# EAGLE board BATCH_V1_1 (EAGLE 6.4)
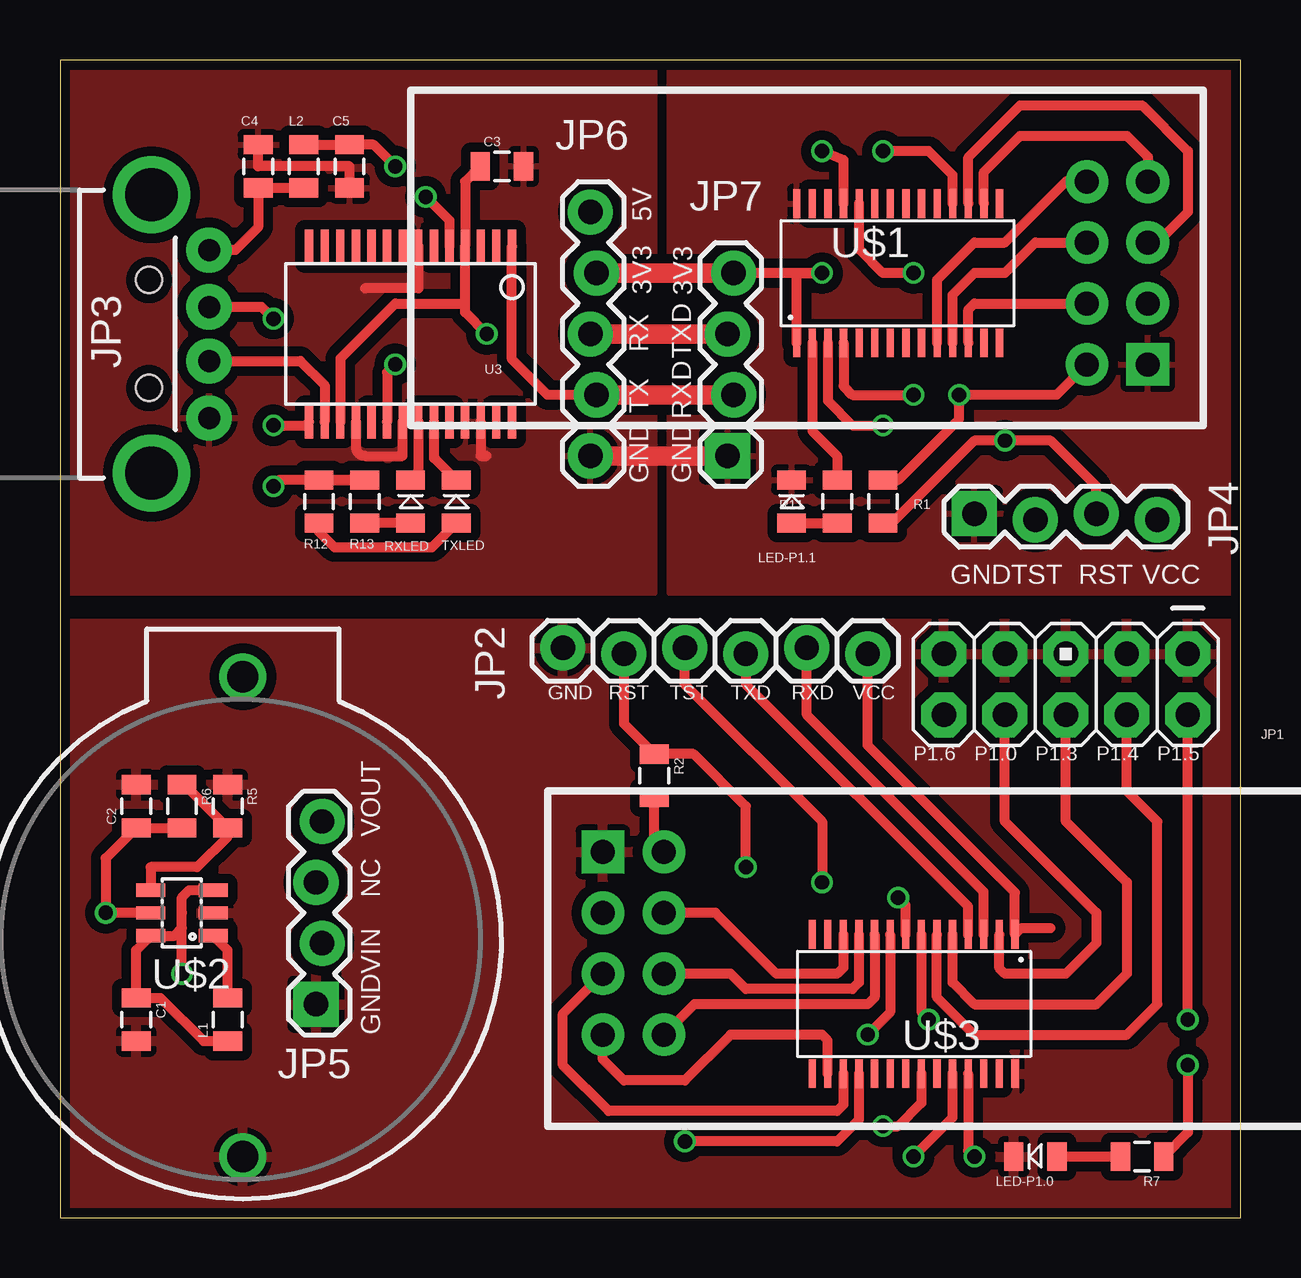
[diagram p0: board, top side]
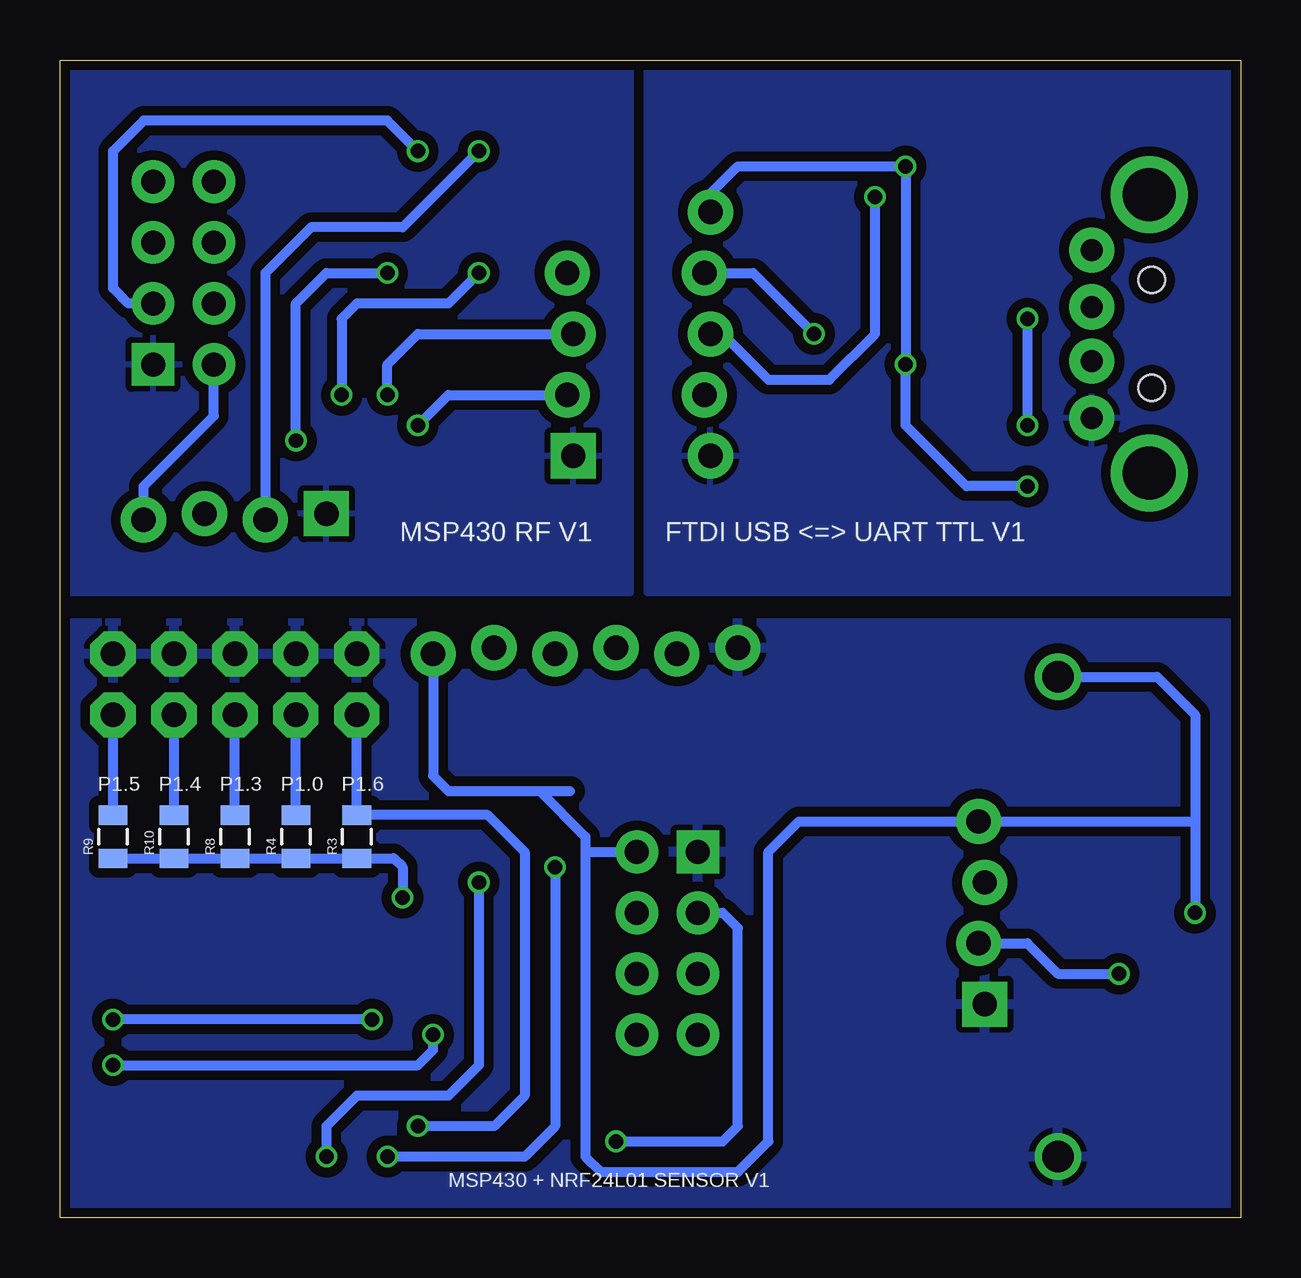
[diagram p1: board, bottom side, seen from below]

Size 49.2 x 48.25 mm. Coordinates in mm from the lower left corner, seen from the top.
Outline: 0,0 49.2,0 49.2,48.25 0,48.25 0,0
Copper layers (1*2*15*16): Top 0.035mm / dielectric 0.2mm / layer 2 0.0175mm / dielectric 1.1mm / layer 15 0.0175mm / dielectric 0.2mm / Bottom 0.035mm
Design rules "SeeedStudio_DRU_no_angle_20130527": minimum track width 6mil, minimum drill 12mil, track to track 6mil, track to pad 6mil, pad to pad 6mil, via to via 6mil, smd to smd 0mil, copper to edge 10mil, drill to drill 10mil, minimum pad ring 6mil, minimum via ring 6mil, stop-mask expansion 2mil, vias tented up to drill 25mil, thermal gap 10mil

## Footprints (pad centres in the part's own frame; a part is rotated, then mirrored left to right if it is on the bottom)
BATTCOM_20MM_PTH = drill 1.3: 1 20,0; 2 0,0
0805 = smd 0.8 x 1.2: 1 -0.9,0; 2 0.9,0
AVR_ICSP = drill 1.016 pad 1.88 octagon: 1 -1.27,5.08; 2 1.27,5.08; 3 -1.27,2.54; 4 1.27,2.54; 5 -1.27,0; 6 1.27,0; 7 -1.27,-2.54; 8 1.27,-2.54; 9 -1.27,-5.08; 10 1.27,-5.08
1X06_LOCK = drill 1.016 pad 1.88: 1 0,0; 2 2.54,-0.254; 3 5.08,0; 4 7.62,-0.254; 5 10.16,0; 6 12.7,-0.254
USB-A-H = drill 0.914 pad 1.88: D+ 2.4,1.127; D- 2.4,-1.127; GND 2.4,3.5; VBUS 2.4,-3.5 | drill 2.2: GND2 0,-5.8; GND3 0,5.8 | hole 1.1: -0.1,2.25; -0.1,-2.25
1X04_LOCK = drill 1.016 pad 1.88 square: 1 0,0.127 | drill 1.016 pad 1.88: 2 2.54,-0.127; 3 5.08,0.127; 4 7.62,-0.127
1X05_LOCK = drill 1.016 pad 1.88: 1 0,0.127; 2 2.54,-0.127; 3 5.08,0.127; 4 7.62,-0.127; 5 10.16,0.127
LED-0805 = smd 0.8 x 1.2: A -0.9,0; C 0.9,0
NRF24L01-4X2 = drill 1 pad 1.778 square: 1 -11.67,3.81 | drill 1 pad 1.778: 2 -9.13,3.81; 3 -11.67,1.27; 4 -9.13,1.27; 5 -11.67,-1.27; 6 -9.13,-1.27; 7 -11.67,-3.81; 8 -9.13,-3.81
SSOP28DB = smd 0.348 x 1.397: 1 -4.225,-3.656; 2 -3.575,-3.656; 3 -2.925,-3.656; 4 -2.275,-3.656; 5 -1.625,-3.656; 6 -0.975,-3.656; 7 -0.325,-3.656; 8 0.325,-3.656; 9 0.975,-3.656; 10 1.625,-3.656; 11 2.275,-3.656; 12 2.925,-3.656; 13 3.575,-3.656; 14 4.225,-3.656; 15 4.225,3.656; 16 3.575,3.656; 17 2.925,3.656; 18 2.275,3.656; 19 1.625,3.656; 20 0.975,3.656; 21 0.325,3.656; 22 -0.325,3.656; 23 -0.975,3.656; 24 -1.625,3.656; 25 -2.275,3.656; 26 -2.925,3.656; 27 -3.575,3.656; 28 -4.225,3.656
PW28 = smd 0.3 x 1.2: 1 -4.229,-2.908; 2 -3.579,-2.908; 3 -2.929,-2.908; 4 -2.279,-2.908; 5 -1.629,-2.908; 6 -0.979,-2.908; 7 -0.329,-2.908; 8 0.321,-2.908; 9 0.971,-2.908; 10 1.621,-2.908; 11 2.271,-2.908; 12 2.921,-2.908; 13 3.571,-2.908; 14 4.221,-2.908; 15 4.221,2.892; 16 3.571,2.892; 17 2.921,2.892; 18 2.271,2.892; 19 1.621,2.892; 20 0.971,2.892; 21 0.321,2.892; 22 -0.329,2.892; 23 -0.979,2.892; 24 -1.629,2.892; 25 -2.279,2.892; 26 -2.929,2.892; 27 -3.579,2.892; 28 -4.229,2.892
SOT23-6L = smd 0.55 x 1.2: 1 -0.95,-1.3; 2 0,-1.3; 3 0.95,-1.3; 4 0.95,1.3; 5 0,1.3; 6 -0.95,1.3

## Placement (x,y rotation side)
BAT1  [BATTCOM_20MM_PTH]  7.62,2.54 90 top
C1  [0805]  3.17,8.26 270 top
C2  [0805]  3.17,17.14 90 top
C3  0.1uF  [0805]  18.41,43.81 0 top
C4  0.1uF  [0805]  8.26,43.81 90 top
C5  10uF  [0805]  12.06,43.81 270 top
JP1  M05X2PTH  [AVR_ICSP]  41.91,22.23 270 top
JP2  [1X06_LOCK]  33.66,23.5 180 top
JP3  USB-B  [USB-A-H]  3.81,36.83 0 top
JP4  [1X04_LOCK]  38.1,29.21 0 top
JP5  [1X04_LOCK]  10.79,8.89 90 top
JP6  [1X05_LOCK]  22.23,31.75 90 top
JP7  [1X04_LOCK]  27.94,31.75 90 top
L1  [0805]  6.99,8.26 90 top
L2  [0805]  10.16,43.81 90 top
LED-P1.0  [LED-0805]  40.64,2.54 180 top
LED-P1.1  [LED-0805]  30.48,29.84 90 top
R1  47K  [0805]  34.29,29.84 90 top
R2  47K  [0805]  24.77,18.41 270 top
R3  47K  [0805]  36.83,15.88 90 bottom
R4  47K  [0805]  39.37,15.88 90 bottom
R5  [0805]  6.99,17.14 270 top
R6  [0805]  5.08,17.14 270 top
R7  220  [0805]  45.09,2.54 180 top
R8  47K  [0805]  41.91,15.88 90 bottom
R9  47K  [0805]  46.99,15.88 90 bottom
R10  47K  [0805]  44.45,15.88 90 bottom
R11  220  [0805]  32.38,29.84 270 top
R12  330  [0805]  10.79,29.84 270 top
R13  330  [0805]  12.7,29.84 270 top
RXLED  [LED-0805]  14.61,29.84 90 top
TXLED  [LED-0805]  16.51,29.84 90 top
U1  NRF24L01-4X2  [NRF24L01-4X2]  33.66,39.37 180 top
U2  NRF24L01-4X2  [NRF24L01-4X2]  34.29,11.43 0 top
U3  FT232RL-BASICSSOP  [SSOP28DB]  14.61,36.83 180 top
U$1  G2XX3---PW28  [PW28]  34.92,39.37 0 top
U$2  TI-TLV61220  [SOT23-6L]  5.08,12.7 90 top
U$3  G2XX3---PW28  [PW28]  35.56,8.89 180 top

## Library data of the parts
BAT1 = SparkFun-Electromechanical
C1 C2 L1 L2 R5 R6 R12 R13 = SparkFun-Passives
C3-C5 = SparkFun-Capacitors
JP1-JP7 = SparkFun-Connectors
LED-P1.0 LED-P1.1 RXLED TXLED U$2 = custom
R1-R4 R7-R11 = SparkFun-Resistors
U1 U2 = untitled
U3 = SparkFun-DigitalIC
U$1 U$3 = TI_MSP430_v16

## Nets
5V: C5.1 JP6.5 L2.2 R12.1 R13.1 U3.20
GND: BAT1.2 C1.2 C2.2 JP1.1 JP1.3 JP1.5 JP1.7 JP1.9 JP2.6 JP5.1 LED-P1.0.C R5.1 U2.1 U$2.2 U$3.28
GND1: C3.2 C4.2 C5.2 JP3.VBUS JP4.1 JP6.1 JP7.1 LED-P1.1.C U1.1 U3.7 U3.18 U3.21 U3.25 U3.26 U$1.28
N$1: R3.1 R4.1 R8.1 R9.1 R10.1 U$3.8
N$2: U1.3 U$1.18
N$3: U1.5 U$1.17
N$4: U1.7 U$1.16
N$5: U1.6 U$1.11
N$6: U1.4 U$1.12
N$7: R13.2 RXLED.A
N$8: LED-P1.1.A R11.2
N$9: RXLED.C U3.22
N$10: R12.2 TXLED.A
N$11: TXLED.C U3.23
N$12: U1.8 U$1.10
N$13: L1.2 U$2.1
N$14: R5.2 R6.1 U$2.4
N$15: LED-P1.0.A R7.2
N$16: C4.1 JP3.GND L2.1
N$17: U2.3 U$3.18
N$18: U2.5 U$3.17
N$19: U2.7 U$3.16
N$20: U2.6 U$3.11
N$21: U2.4 U$3.12
N$22: U2.8 U$3.10
N$23: R7.1 U$3.9
N$24: R11.1 U$1.2
P1.0: JP1.8 R4.2 U$3.2
P1.3: JP1.6 R8.2 U$3.5
P1.4: JP1.4 R10.2 U$3.6
P1.5: JP1.2 R9.2 U$3.7
P1.6: JP1.10 R3.2 U$3.22
RESET: JP2.5 R2.1 U$3.24
RESET1: JP4.3 R1.1 U$1.24
RX: JP6.3 JP7.3 U3.5 U$1.4
RXD: JP2.2 U$3.3
TEST: JP2.4 U$3.25
TEST1: JP4.2 U$1.25
TX: JP6.2 JP7.2 U3.1 U$1.3
TXD: JP2.3 U$3.4
USBDM: JP3.D- U3.16
USBDP: JP3.D+ U3.15
VCC: BAT1.1 C2.1 JP2.1 JP5.4 R2.2 R6.2 U2.2 U$2.5 U$3.1
VCC1: C3.1 JP4.4 JP6.4 JP7.4 R1.2 U1.2 U3.4 U3.17 U$1.1
VIN: C1.1 JP5.2 L1.1 U$2.3 U$2.6

## Tracks (layer width: path | path; a pad name or v marks a point on that pad's centre or on a via)
5V  (via drill 0.6)
  Top 0.406: L2.2 C5.1 | C5.1 11.8,44.72 | v13.97,35.56 13.63,35.22 U3.20 | R12.1 R13.1 9.15,30.75 v8.89,30.48 | v13.97,43.81 13.07,44.72 C5.1
  Bottom 0.406: v8.89,30.48 11.43,30.48 13.97,33.02 v13.97,35.56 v13.97,43.81 20.95,43.81 22.1,42.67 JP6.5
GND
  pour Top (isolate 0.406): -1.27,24.77 48.9,24.77 48.9,0 -1.27,0
  pour Bottom (isolate 0.406): -1.27,24.77 48.9,24.77 48.9,0 -1.27,0
GND1
  Top 0.406: U3.7 14.93,38.73 12.7,38.73 | C5.2 12.06,43.81 8.26,43.81 C4.2 | U3.26 17.53,31.75 17.78,31.75 | U3.18 12.33,32.12 arc90 12.7,31.75 14.28,31.75 U3.21
  Top 0.813: JP6.1 JP7.1
  pour Bottom (isolate 0.406, rank 3): 0,26.04 0,48.26 24.77,48.26 24.77,26.04
  pour Top (isolate 0.406): -1.27,48.26 24.77,48.26 24.77,26.04 -1.27,26.04
  pour Top (isolate 0.406): 49.53,26.04 25.4,26.04 25.4,48.26 49.53,48.26
  pour Bottom (isolate 0.406, rank 3): 49.53,26.04 25.4,26.04 25.4,48.26 49.53,48.26
N$1  (via drill 0.6)
  Top 0.406: U$3.8 35.24,13.02 v34.92,13.34
  Bottom 0.406: R9.1 R10.1 R8.1 R4.1 R3.1 35.3,14.97 34.92,14.61 v34.92,13.34
N$2  (via drill 0.6)
  Top 0.406: U$1.18 37.2,43.45 36.2,44.45 v34.29,44.45
  Bottom 0.406: v34.29,44.45 35.56,45.72 45.72,45.72 46.99,44.45 46.99,38.73 46.35,38.1 U1.3
N$3
  Top 0.406: U$1.17 37.85,44.2 40.01,46.35 45.09,46.35 46.99,44.45 46.99,41.91 45.72,40.64 U1.5
N$4
  Top 0.406: U$1.16 38.5,43.58 40.01,45.09 44.45,45.09 45.33,44.21 U1.7
N$5
  Top 0.406: U$1.11 37.2,38.47 38.1,39.37 39.37,39.37 40.64,40.64 U1.6
N$6
  Top 0.406: U$1.12 37.85,37.85 38.1,38.1 U1.4
N$7
  Top 0.406: RXLED.A R13.2
N$8
  Top 0.406: LED-P1.1.A R11.2
N$9
  Top 0.406: U3.22 14.93,31.07 RXLED.C
N$10
  Top 0.406: R12.2 10.79,28.57 11.43,27.94 15.51,27.94 TXLED.A
N$11
  Top 0.406: U3.23 15.58,31.64 15.62,31.64 TXLED.C
N$12
  Top 0.406: U$1.10 36.55,39.09 38.1,40.64 39.37,40.64 41.91,43.18 U1.8
N$13
  Top 0.406: L1.2 6.99,11.14 U$2.1
N$14
  Top 0.406: U$2.4 3.78,14.61 5.71,14.61 6.99,15.88 R5.2 5.18,18.05 R6.1
N$15
  Top 0.406: 41.65,2.65 LED-P1.0.A R7.2
N$16
  Top 0.406: L2.1 C4.1 8.26,41.27 7.31,40.33 JP3.GND
N$17  (via drill 0.6)
  Top 0.406: U$3.18 33.29,4.08 32.38,3.17 v26.04,3.17
  Bottom 0.406: v26.04,3.17 21.59,3.17 20.95,3.81 20.95,12.06 21.59,12.7 U2.3
N$18
  Top 0.406: U$3.17 32.64,4.7 32.38,4.45 22.86,4.45 20.95,6.35 20.95,8.49 U2.5
N$19
  Top 0.406: U$3.16 31.99,7.38 31.75,7.62 27.94,7.62 26.04,5.71 23.5,5.71 22.62,6.59 U2.7
N$20
  Top 0.406: U$3.11 33.29,9.79 33.02,9.53 28.57,9.53 27.94,10.16 U2.6
N$21
  Top 0.406: U$3.12 32.64,10.41 32.38,10.16 29.84,10.16 27.3,12.7 U2.4
N$22
  Top 0.406: U$3.10 33.94,9.17 33.66,8.89 26.43,8.89 U2.8
N$23  (via drill 0.6)
  Top 0.406: U$3.9 34.59,8.55 v33.66,7.62 | v46.99,6.35 46.99,3.54 R7.1
  Bottom 0.406: v46.99,6.35 34.29,6.35 33.66,6.99 v33.66,7.62
N$24
  Top 0.406: U$1.2 31.35,32.79 32.38,31.75 R11.1
P1.0
  Top 0.406: U$3.2 39.14,10.39 39.37,10.16 41.91,10.16 43.18,11.43 43.18,12.7 39.37,16.51 JP1.8
  Bottom 0.406: R4.2 JP1.8
P1.3
  Top 0.406: U$3.5 37.19,9.8 38.1,8.89 43.18,8.89 44.45,10.16 44.45,13.97 41.91,16.51 JP1.6
  Bottom 0.406: R8.2 JP1.6
P1.4
  Top 0.406: U$3.6 36.54,9.18 38.1,7.62 44.45,7.62 45.72,8.89 45.72,16.51 44.45,17.78 JP1.4
  Bottom 0.406: R10.2 JP1.4
P1.5  (via drill 0.6)
  Top 0.406: U$3.7 35.89,8.58 v36.2,8.26 | v46.99,8.26 JP1.2
  Bottom 0.406: v36.2,8.26 v46.99,8.26 | R9.2 JP1.2
P1.6  (via drill 0.6)
  Top 0.406: U$3.22 35.89,4.77 34.92,3.81 v34.29,3.81
  Bottom 0.406: v34.29,3.81 31.11,3.81 29.84,5.08 29.84,15.24 31.38,16.77 R3.2 JP1.10
RESET  (via drill 0.6)
  Top 0.406: v35.56,2.54 37.19,4.17 U$3.24 | v28.57,14.61 28.57,17.14 26.41,19.32 R2.1 23.5,20.59 JP2.5
  Bottom 0.406: v28.57,14.61 28.57,3.81 29.84,2.54 v35.56,2.54
RESET1  (via drill 0.6)
  Top 0.406: JP4.3 43.18,30.48 41.27,32.38 v39.37,32.38 38.1,32.38 34.66,28.95 R1.1 | v35.56,39.37 34.29,39.37 33.3,40.36 U$1.24
  Bottom 0.406: v39.37,32.38 39.37,38.1 38.1,39.37 v35.56,39.37
RX  (via drill 0.6)
  Top 0.406: U$1.4 32.65,34.66 33.02,34.29 v35.56,34.29 | U3.5 16.23,41.55 v15.24,42.55
  Top 0.813: JP7.3 JP6.3
  Bottom 0.406: v35.56,34.29 35.56,35.56 34.29,36.83 JP7.3 | v15.24,42.55 15.24,36.83 17.14,34.92 19.68,34.92 21.59,36.83 JP6.3
RXD
  Top 0.406: U$3.3 38.49,13.58 31.11,20.95 JP2.2
TEST  (via drill 0.6)
  Top 0.406: U$3.25 37.84,2.8 v38.1,2.54 | JP2.4 26.04,22.23 31.75,16.51 v31.75,13.97
  Bottom 0.406: v31.75,13.97 31.75,6.35 33.02,5.08 36.83,5.08 38.1,3.81 v38.1,2.54
TEST1  (via drill 0.6)
  Top 0.406: U$1.25 32.65,44.08 v31.75,44.45
  Bottom 0.406: v31.75,44.45 34.92,41.27 38.73,41.27 40.64,39.37 JP4.2
TX  (via drill 0.6)
  Top 0.406: U$1.3 32,34.04 33.02,33.02 v34.29,33.02 | JP6.2 20.32,34.29 18.83,35.78 U3.1
  Top 0.813: JP6.2 JP7.2
  Bottom 0.406: v34.29,33.02 33.02,34.29 JP7.2
TXD
  Top 0.406: U$3.4 37.84,12.96 28.57,22.23 JP2.3
USBDM
  Top 0.406: U3.16 11.03,34.69 10.02,35.7 JP3.D-
USBDP  (via drill 0.6)
  Top 0.406: v8.89,33.02 10.23,33.02 U3.15 | v8.89,37.47 8.4,37.96 JP3.D+
  Bottom 0.406: v8.89,37.47 v8.89,33.02
VCC  (via drill 0.6)
  Top 0.406: 41.27,12.06 40.06,12.06 U$3.1 39.79,13.55 33.66,19.68 JP2.1 | R6.2 C2.1 1.91,14.97 v1.91,12.7 U$2.5 | U2.2 24.77,15.63 R2.2
  Bottom 0.406: JP2.1 33.66,18.41 33.02,17.78 29.21,17.78 | BAT1.1 3.49,22.54 1.91,20.95 1.91,16.51 | 1.91,16.51 v1.91,12.7 | 27.3,15.24 27.3,2.54 26.67,1.91 20.95,1.91 19.68,3.17 19.68,15.24 18.41,16.51 JP5.4 1.91,16.51 | 29.21,17.78 27.94,17.78 | 27.3,15.24 U2.2 | 29.21,17.78 27.3,15.88 27.3,15.24
VCC1  (via drill 0.6)
  Top 0.406: U3.17 11.68,35.81 13.97,38.1 16.88,38.1 U3.4 | C3.1 16.88,43.18 U3.4 | 27.79,39.37 JP7.4 v31.75,39.37 30.7,39.37 U$1.1 | v17.78,36.83 16.88,37.73 U3.4 | U1.2 41.52,34.29 v37.47,34.29 37.47,33.28 34.92,30.75 R1.2
  Top 0.813: JP6.4 JP7.4
  Bottom 0.406: v31.75,39.37 33.02,38.1 36.83,38.1 37.47,37.47 v37.47,34.29 | JP6.4 20.32,39.37 v17.78,36.83 | JP4.4 45.72,30.48 42.78,33.41 U1.2
VIN  (via drill 0.6)
  Top 0.406: L1.1 5.98,7.36 4.18,9.15 C1.1 3.17,11.14 U$2.6 4.76,11.75 5.08,12.06 | 5.08,12.06 5.08,12.7 5.08,13.34 5.39,13.65 U$2.3 | v5.08,10.16 5.08,12.06
  Bottom 0.406: JP5.2 8.89,11.43 7.62,10.16 v5.08,10.16

## Text on the board
tPlace: 5V | 3V3 | 3V3 | RX | TXD | TX | RXD | GND | GND | GND | TST | RST | VCC | GND | RST | TST | TXD | RXD | VCC | P1.6 | P1.0 | P1.3 | P1.4 | P1.5 | VOUT | NC | VIN | GND
bPlace: FTDI USB <=> UART TTL V1 | MSP430 RF V1 | P1.6 | P1.0 | P1.3 | P1.4 | P1.5 | MSP430 + NRF24L01 SENSOR V1